# Altium PCB relaytimer.PcbDoc
Units mm, origin at the board's own origin, x right, y up, seen from the top; angles counter-clockwise.
Board outline 82.04 x 56.9 mm, 2 copper layers (Top Layer, Bottom Layer); 23 components, 15 nets, 78 pads, 0 vias.
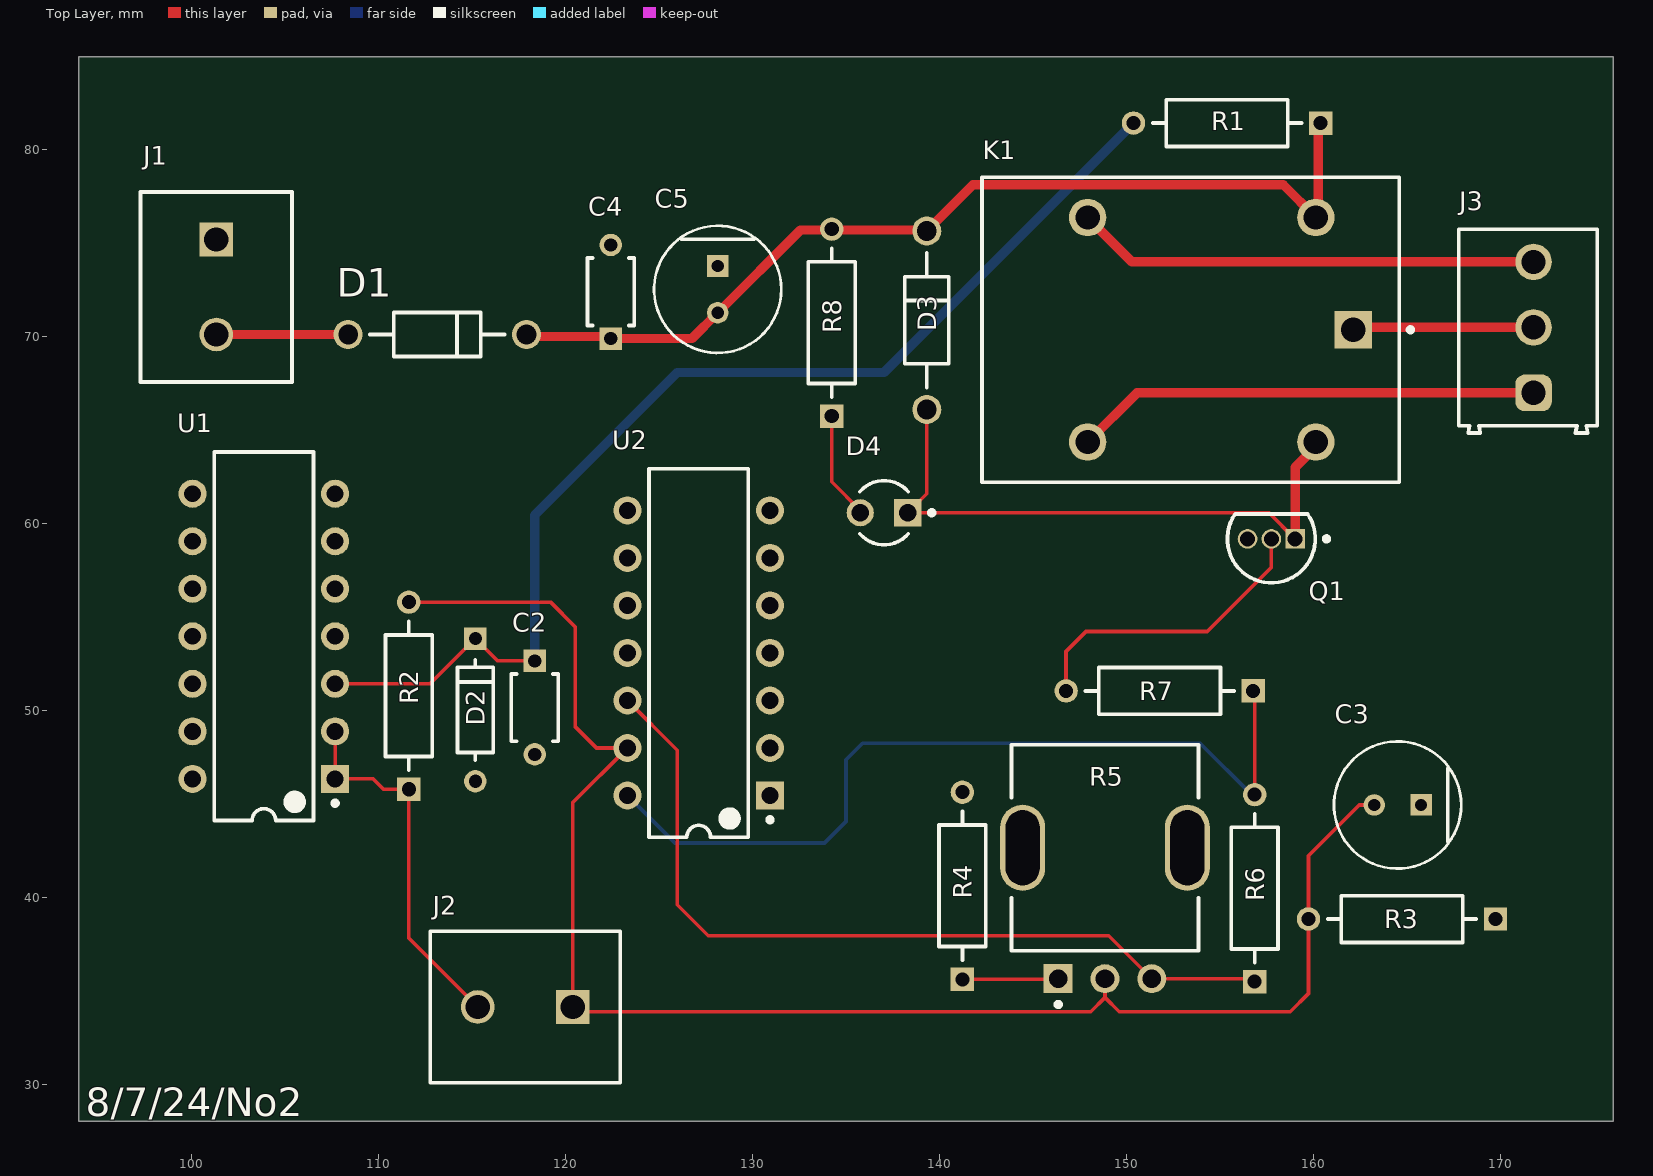
[diagram p0: Top Layer view]
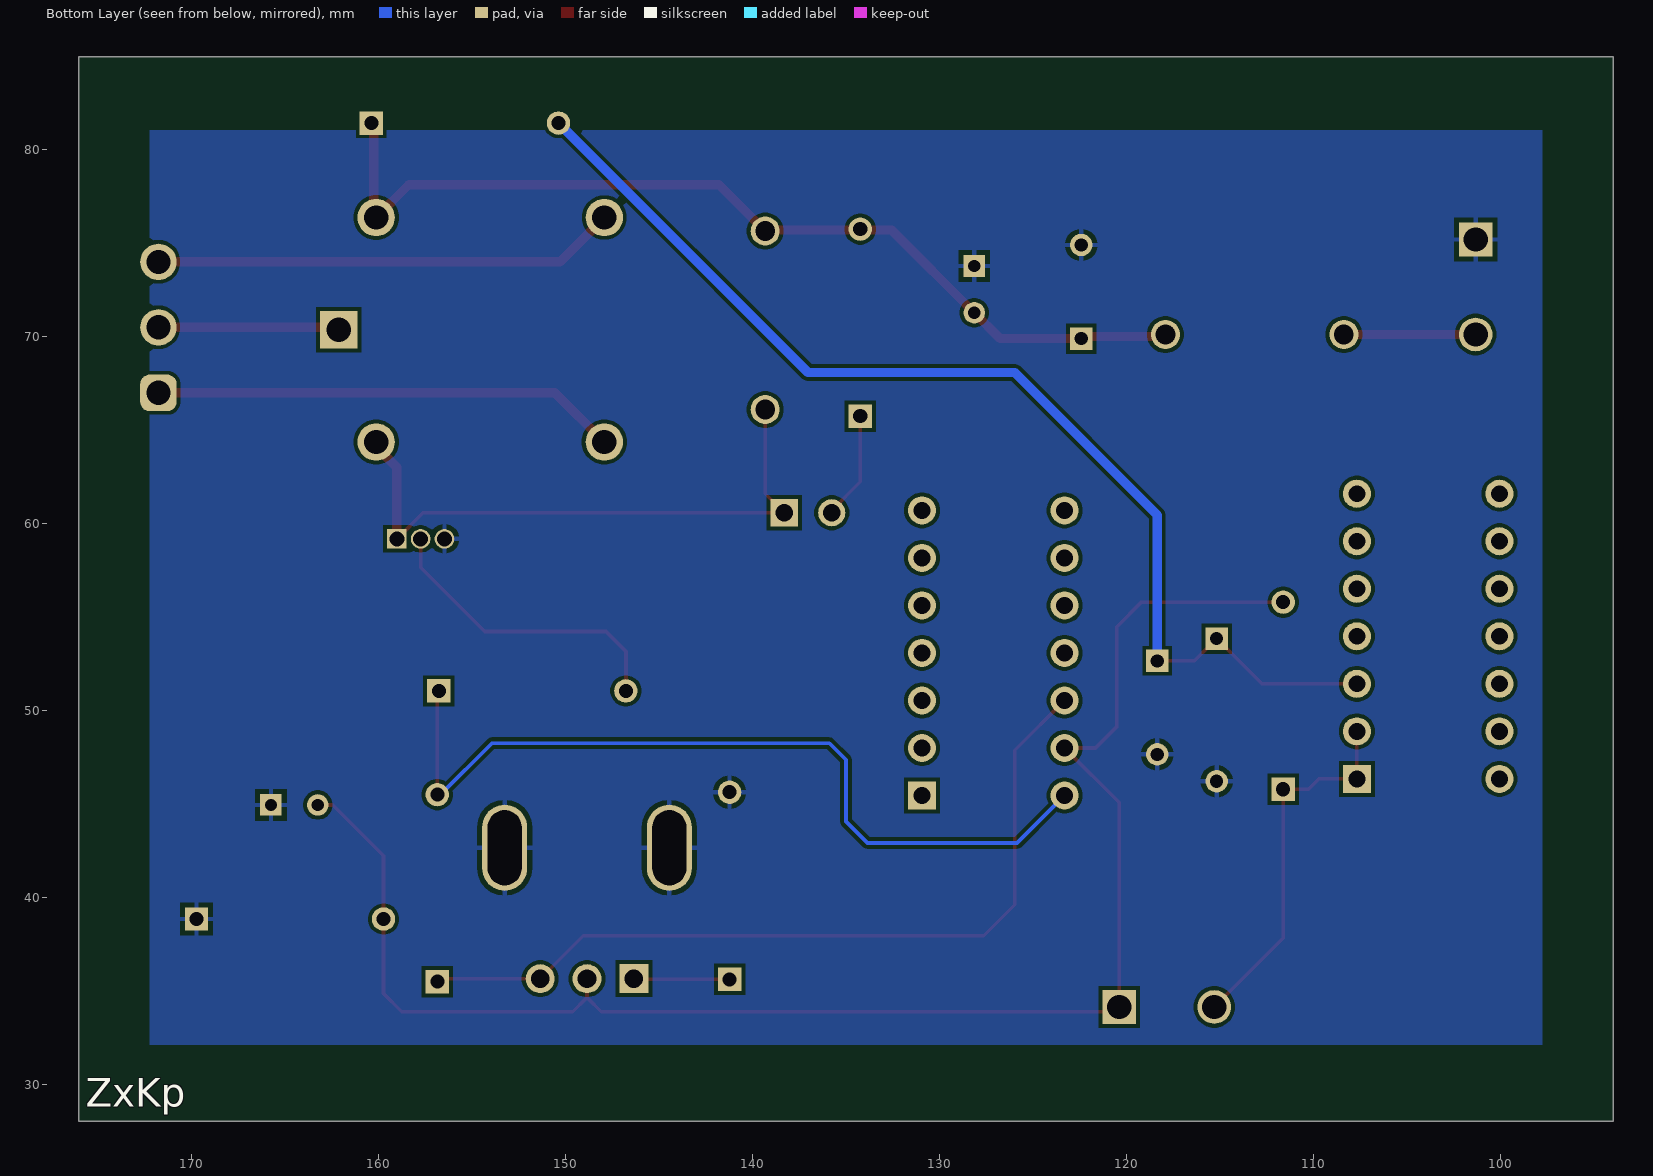
[diagram p1: Bottom Layer view, seen from below]
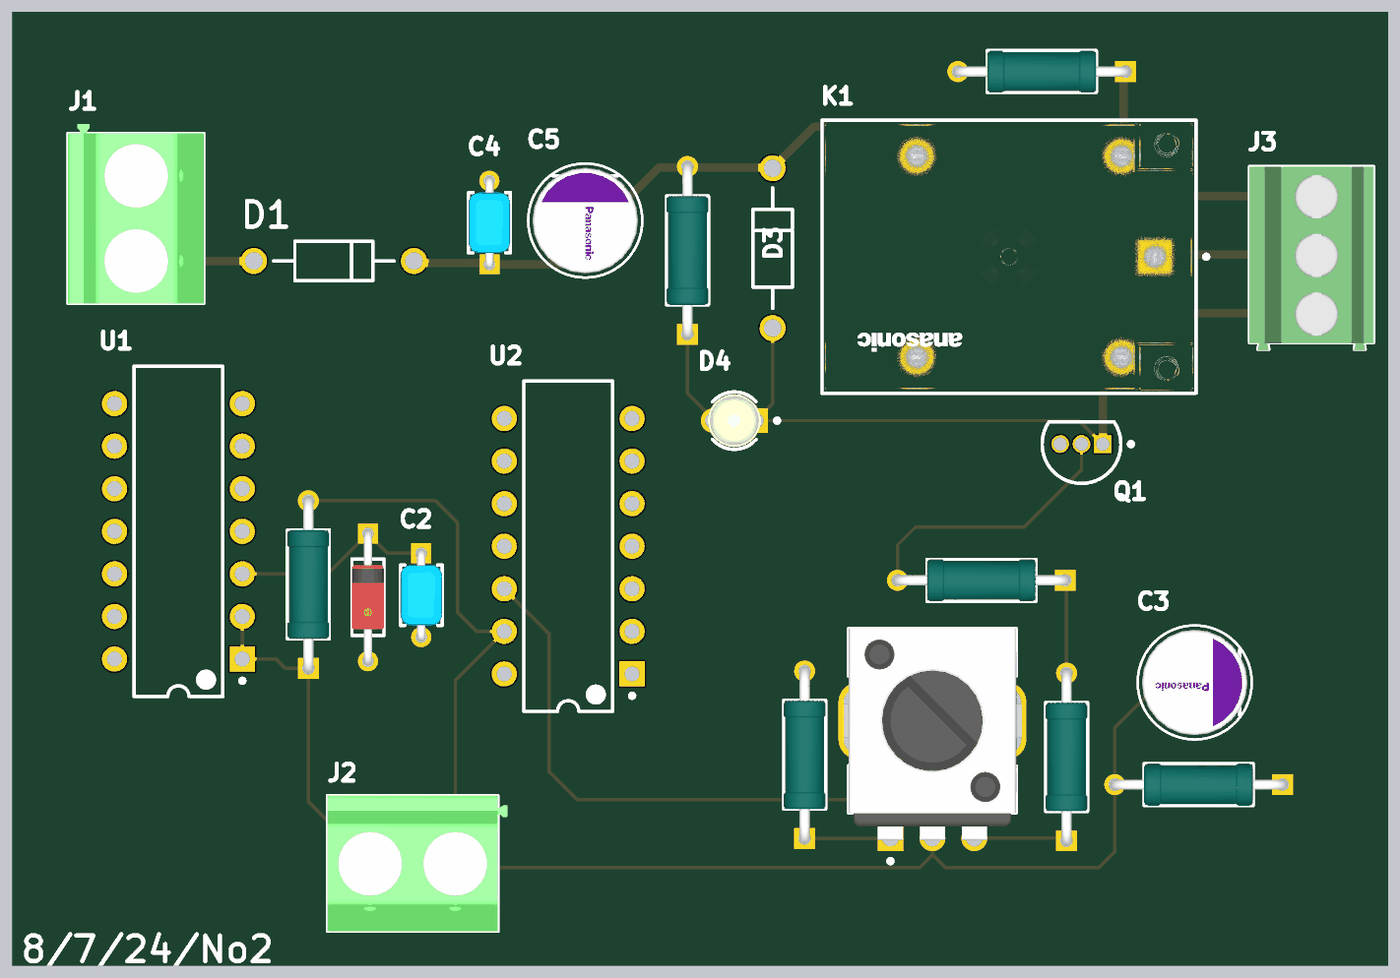
[diagram p2: 3D render of the assembled board from above, using the file's embedded part models]

## Layer stack, top to bottom
Top Solder: solder mask 0.0102, Solder Resist, Dk 3.5
Top Layer: signal copper 0.0356
Dielectric 1: dielectric 0.32, FR-4, Dk 4.8
Bottom Layer: signal copper 0.0356
Bottom Solder: solder mask 0.0102, Solder Resist, Dk 3.5

## Board outline
93.98,28.067 176.022,28.067 176.022,84.963 93.98,84.963

## Design rules (kind name [scope] priority, off if disabled: settings)
Clearance [All] p1: gap=0.2 ignorepadtopadclearanceinfootprint=FALSE
PolygonConnect [All] p1: connectstyle=Relief reliefconductorwidth=0.254 reliefentries=4 polygonreliefangle="90 Angle" airgapwidth=0.254
RoutingVias [All] p1: holewidth=0.3 width=0.7 viastyle="Through Hole" minholewidth=0.3 minwidth=0.7 maxholewidth=0.3 maxwidth=0.7
SolderMaskExpansion [All] p1: expansion=0.102 istentingtop=FALSE
SupplyNets "Schematic Supply Nets_1" [InNet('5V')] p1: voltage=0.000
SupplyNets "Schematic Supply Nets" [InNet('GND')] p2: voltage=0.000
Width [All] p1: maxlimit=1 minlimit=0.2 preferedwidth=0.2
30 further rules are at their usual default settings.

## Components (designator, comment, footprint, x,y, rotation, side; value= is the part's Value field where it differs from the comment)
C2 "100nF" FP-RCE0K1-MFG 118.364,50.165 r270 top
C3 "100uF" FP-OS-CON-TH-C6-d_0_45-MFG 164.485,44.958 r180 top
C4 "100nF" FP-RCE0K1-MFG 122.428,72.39 r90 top
C5 "470uF" FP-OS-CON-TH-C6-d_0_45-MFG 128.143,72.517 r270 top
D1 "1N4007" ONSC-AXIAL_LEAD-2-59-10_P 113.157,70.104 r180 top
D2 "5.1V" FP-017AG-MFG 115.189,50.038 r270 top
D3 "1N4007" ONSC-AXIAL_LEAD-2-59-10_P 139.319,70.866 r270 top
D4 "red" FP-HLMP-1719-MFG 137.033,60.579 r180 top
J1 "1729128" PHOE-1729128-2_V 101.346,72.644 r270 top
J2 "1729128" PHOE-1729128-2_V 117.856,34.163 r180 top
J3 "691214110003" 691214110003 171.45,70.485 r90 top
K1 "JS1-5V-F" FP-JS1-5V-F-MFG 153.416,70.358 r180 top (schematic designator K`)
Q1 "BC550CG" ONSC-TO-92-3-29-11 157.734,59.182 r180 top
R1 "1k" FP-MRS25-MFG 155.368,81.407 r180 top
R2 "1k" FP-MRS25-MFG 111.633,50.8 r90 top
R3 "10k" FP-MRS25-MFG 164.719,38.862 r180 top
R4 "120k" FP-MRS25-MFG 141.224,40.64 r90 top
R5 "PTV09A-4020F-A203" FP-PTV09A-4020-MFG 148.844,42.672 r0 top value=20kΩ
R6 "6.8M" FP-MRS25-MFG 156.845,40.513 r90 top
R7 "10k" FP-MRS25-MFG 151.765,51.054 r180 top
R8 "1k" FP-MRS25-MFG 134.239,70.739 r90 top
U1 "LM324N" N0014A 103.886,53.975 r180 top
U2 "LM324N" N0014A 127.127,53.086 r180 top

## Footprints (in the part's own frame and the unit in brackets; to place one, negate y for a bottom-side part, rotate by r counter-clockwise, add the part's x,y. Pads: shape width x height; smd on the part's side, far side on the other; paste and mask are expansions set on the pad)
691214110003 [mm] "3.50 mm Horizontal Entry Modular, 3p"
  rrect50% 1.95x1.95 hole 1.3: 1(-3.5,-0.3)
  round 1.95 hole 1.3: 2(0,-0.3) 3(3.5,-0.3)
  silkscreen extent -5.65,-3.7 5.25,3.7, body extent -5.7,-3.7 5.25,3.7, height 8.55
FP-017AG-MFG [mm]
  rect 1.2x1.2 hole 0.7 paste-2539.97 mask+0: 1(-3.813,0)
  round 1.2 hole 0.7 paste-2539.97 mask+0: 2(3.813,0)
  silkscreen extent -2.68,-0.95 2.68,0.95, body extent -4.51,-1.05 4.51,1.05, height 0.25
FP-HLMP-1719-MFG [mm]
  rect 1.45x1.45 hole 0.95 paste-2539.97 mask+0: 1(-1.27,0)
  round 1.45 hole 0.95 paste-2539.97 mask+0: 2(1.27,0)
  silkscreen extent -2.68,-1.71 1.3,1.71, body extent -2.22,-2.22 2.22,2.22, height 0.25
FP-JS1-5V-F-MFG [mm]
  rect 2x2 hole 1.3 paste-2539.97 mask+0: 1(-8.7,0)
  round 2 hole 1.3 paste-2539.97 mask+0: 2(-6.7,-6) 3(5.5,-6) 4(5.5,6) 5(-6.7,6)
  silkscreen extent -11.88,-8.15 11.15,8.15, body extent -11.25,-8.25 11.25,8.25, height 0.25
FP-MRS25-MFG [mm]
  rect 1.25x1.25 hole 0.75 paste-2539.97 mask+0: 1(-5,0)
  round 1.25 hole 0.75 paste-2539.97 mask+0: 2(5,0)
  silkscreen extent -3.98,-1.25 3.98,1.25, body extent -5.72,-1.35 5.72,1.35, height 0.25
FP-OS-CON-TH-C6-d_0_45-MFG [mm]
  rect 1.15x1.15 hole 0.65 paste-2539.97 mask+0: 1(-1.25,0)
  round 1.15 hole 0.65 paste-2539.97 mask+0: 2(1.25,0)
  silkscreen extent -3.4,-3.4 3.4,3.4, body extent -3.5,-3.5 3.5,3.5, height 0.25
FP-PTV09A-4020-MFG [mm]
  rect 1.55x1.55 hole 1 paste-2539.97 mask+0: 1(-2.5,-7)
  round 1.55 hole 1 paste-2539.97 mask+0: 2(0,-7) 3(2.5,-7)
  rrect100% 2.4x4.6 hole 4 slot 1.8 at 0 deg paste-2539.97 mask+0: 4(-4.4,0) 5(4.4,0)
  silkscreen extent -5,-8.5 5,5.5, body extent -5.8,-7.88 5.8,5.6, height 0.25
FP-RCE0K1-MFG [mm]
  rect 1.2x1.2 hole 0.7 paste-2539.97 mask+0: 1(-2.5,0)
  round 1.2 hole 0.7 paste-2539.97 mask+0: 2(2.5,0)
  silkscreen extent -1.8,-1.25 1.8,1.25, body extent -3.2,-1.35 3.2,1.35, height 0.25
N0014A [mm] "DIP, 14-Leads, Body 19.7x6.6mm, Pitch 2.54mm"
  rect 1.5x1.5 hole 0.9: 1(-3.81,7.62)
  round 1.5 hole 0.9: 2(-3.81,5.08) 3(-3.81,2.54) 4(-3.81,0) 5(-3.81,-2.54) 6(-3.81,-5.08) 7(-3.81,-7.62) 8(3.81,-7.62) 9(3.81,-5.08) 10(3.81,-2.54) 11(3.81,0) 12(3.81,2.54) 13(3.81,5.08) 14(3.81,7.62)
  silkscreen extent -3.94,-9.85 2.65,9.85, body extent -3.95,-9.85 3.95,9.85, height 5.08
ONSC-AXIAL_LEAD-2-59-10_P [mm] "AXIAL, 2-Leads, Diameter 2.35mm"
  round 1.55 hole 1.05: 1(-4.77,0) 2(4.77,0)
  silkscreen extent -3.59,-1.17 3.59,1.17
ONSC-TO-92-3-29-11 [mm] "TO, 3-Leads, Body Dia 4.7mm, Pitch 1.27mm"
  rect 1.05x1.05 hole 0.8: 1(-1.27,0)
  round 1.05 hole 0.8: 2(0,0) 3(1.27,0)
  silkscreen extent -3.08,-1.34 2.35,2.35, body extent -2.35,-1.33 2.36,2.36, height 7.87
PHOE-1729128-2_V [mm] "Receptacle, 2-Leads, Body 8.1x10.16mm, Pitch 5.08mm"
  rect 1.8x1.8 hole 1.3: 1(-2.54,0)
  round 1.8 hole 1.3: 2(2.54,0)
  silkscreen extent -5.08,-4.05 5.08,4.05, body extent -5.65,-4.05 5.08,4.05, height 10.01

## Part data
C2 C4: library part CMP-06035-058483-1, "Cap Ceramic 100nF 50V X7R ±10% Radial 5mm +125°C Automotive Bulk", Case/Package=Radial, Dielectric=X7R, Max Operating Temperature=125°C, Min Operating Temperature=-55°C, Package Quantity=500, Ratings=AEC-Q200, Resistor Type=Ceramic, Tolerance=10%, Voltage=50V, Capacitance=100nF, Depth=2.5mm, Height=3.5mm, Height - Seated (Max)=0.138inch, Lead Diameter=0.5mm, Lead Free="Lead Free", Lead Pitch=0.197inch, Lead/Base Style="Formed Leads", Length=3.6mm, Mount="Through Hole", Packaging=Bulk, Termination=Radial, Voltage Rating=50V, Voltage Rating (DC)=50V, Width=0.098inch
C3: library part CMP-05428-000575-1, "Conductive Polymer Aluminum Solid Capacitors (OS-CON) 100uF ±20% 16V RADIAL TH 6.3x6mm", Case/Package=Radial, ESR (Equivalent Series Resistance)=24mR, Leakage Current=280uA, Max Operating Temperature=105°C, Min Operating Temperature=-55°C, Package Quantity=500, Ripple Current=2.49A, Tolerance=20%, Voltage=16V, Capacitance=100uF, Construction=RADIAL, Diameter=6.3mm, Dissipation Factor=12%, Height=6mm, Height - Seated (Max)=0.236inch, Lead Diameter=0.45mm, Lead Free="Lead Free", Lead Pitch=2.5mm, Length=6mm, Life (Hours)=5000Hour, Mount="Through Hole", Number of Pins=6, Packaging=Bulk, Polarity=Polar, Radiation Hardening=No, REACH SVHC="No SVHC", RoHS Compliant=Yes, Series="OS-CON™, SEPC", Termination=Radial, Voltage Rating=16V, Voltage Rating (DC)=16V
C5: library part CMP-05428-000575-1, "Conductive Polymer Aluminum Solid Capacitors (OS-CON) 470uF ±20% 16V RADIAL TH 6.3x6mm", Case/Package=Radial, ESR (Equivalent Series Resistance)=24mR, Leakage Current=280uA, Max Operating Temperature=105°C, Min Operating Temperature=-55°C, Package Quantity=500, Ripple Current=2.49A, Tolerance=20%, Voltage=16V, Capacitance=470uF, Construction=RADIAL, Diameter=6.3mm, Dissipation Factor=12%, Height=6mm, Height - Seated (Max)=0.236inch, Lead Diameter=0.45mm, Lead Free="Lead Free", Lead Pitch=2.5mm, Length=6mm, Life (Hours)=5000Hour, Mount="Through Hole", Number of Pins=6, Packaging=Bulk, Polarity=Polar, Radiation Hardening=No, REACH SVHC="No SVHC", RoHS Compliant=Yes, Series="OS-CON™, SEPC", Termination=Radial, Voltage Rating=16V, Voltage Rating (DC)=16V
D1 D3: library part CMP-0902-00142-1, "Standard Recovery Rectifier, 2-Pin Axial_Lead, Pb-Free, Bulk Bag", Manufacturer="On Semiconductor", ComponentLink1Description="Manufacturer URL", ComponentLink1URL=http://www.onsemi.com/, ComponentLink2Description=Datasheet, ComponentLink2URL=http://www.onsemi.com/pub_link/Collateral/1N4001-D.PDF, ComponentLink3Description="Package Specification", ComponentLink3URL=http://www.onsemi.cn/pub_link/Collateral/59-10.PDF, DatasheetVersion="Rev. 13", IFSM Max (A)=30, IO(rec) Max (A)=1, Mounting Technology="Through Hole", PackageDescription="2-Pin, Axial Lead, Diameter 2.35 mm", PackageReference=AXIAL_LEAD-2-59-10, PackageVersion="Rev. U, 02/2005", Packing="Bulk Bag", PartNumber=1N4007, RoHS=TRUE, Type="Standard Recovery", VRRM Max (V)=1000
D2: library part CMP-00278-84409037-1, "BZX79C3V3 BZX79C Series 500 mW 5.1 V 100 mA Through Hole Zener Diode - DO-35", Breakdown Voltage=3.3V, Capacitance=200pF, Forward Voltage=1.5V, Manufacturer Lifecycle Status=ACTIVE, Max Junction Temperature (Tj)=200°C, Max Power Dissipation=500mW, Max Reverse Leakage Current=25µA, Min Operating Temperature=-65°C, Reverse Voltage=1V, Test Current=5mA, Tolerance=6%, Voltage Tolerance=5%, Contact Plating=Tin, Diameter=1.91mm, Element Configuration=Single, ESD Protection=No, Height=1.91mm, Impedance=95Ω, Lead Free="Lead Free", Length=4.56mm, Lifecycle Status=Production, Max Operating Temperature=200°C, Mount="Through Hole", NexarPartId=84409037, Number of Pins=2, Packaging=Bulk, Peak Reverse Current=25µA, Power Dissipation=500mW, Power Rating=500mW, REACH SVHC="No SVHC", RoHS=Compliant, Schedule B="8541100050, 8541100050", Voltage Rating (DC)=3.3V, Weight=80g, Width=6.35mm, Working Voltage=3.3V, Zener Current=5mA, Zener Voltage=3.3V
D4: library part CMP-2000-06410-2, "LED RED  / DIFFUSED T-1 T/H", Colour=Yellow, Forward Current=2mA, Forward Voltage=1.8V, Manufacturer=Broadcom, Manufacturer Part Number=HLMP-1719, Package=0, Power Dissipation=17.5mW, Reverse Voltage=5V, Temperature="-40°C to +100°C", Temperature Range High=+100°C, Temperature Range Low=-40°C, Automotive=No, Category=Diode, ComponentLink2Description=Datasheet, ComponentLink2URL=https://docs.broadcom.com/docs/AV02-1557EN, Device Class L1=Optoelectronics, Device Class L2=LEDs, Device Class L3=unset, Digikey Description="LED YELLOW DIFFUSED T-1 T/H", Lead Free=Yes, Led Orientation=Straight, Luminous Intensity=2.1mcd, Mouser Description="Standard LEDs - Through Hole Yellow Diffused 585nm 2.1mcd", Octopart=https://octopart.com/hlmp-1719-broadcom-71130405, RoHS=TRUE, Viewing Angle=50°, Wavelength=585nm
J1 J2: library part CMP-2000-05815-1, "PCB Terminal Block, 13.5 A, 400 V, 2-Pin THD, RoHS, Bulk", Current Rating=13500mA, Manufacturer="Phoenix Contact", Package Description="2-Pin Through Hole Device, Body 8.1 x 10.16 mm, Pitch 5.08 mm", Package Reference=1729128-2, Package Version=03/2015, Voltage Rating=400V, Datasheet URL=https://datasheet.ciiva.com/16046/1729128-16046181.pdf, Datasheet Version=12/2013, Manufacturer URL=http://www.phoenixcontact.com/, Mounting Technology=ThroughHole, No. of Positions=2, No. of Rows=1, Orientation=Horizontal, Package URL=https://www.phoenixcontact.com/online/portal/pi/pxc/product_detail_page/!ut/p/b1/3VdJjqNKFDxLH8AFycySyWY2ozFsEPOMMQaDOX1XedGL_1Vdm5YXJleknhSKeBkvI6EA8ncAo3AYoDhBQGco6KN7VURTdemj9us_IEKEZo_YHiPAEWEFmDGOHMORkqKYCORBZxgL7ZoaZYcbFFUZ3fqxSY6GOuxydWUuHqz1ynmMFygu583Bob0Ewr6Sd_l-5m-kAueHiB0jpRwZwe58wwtkpxtMYd_LmGcDRU02dRNEyWt6Y2ti5pSyJ_reIkzIulrqApdnbT11V5jnCKbYNCvhEM1MCpPByat_X379-iThf08CI5GfOPqfBeS3BRoBOdD55AKVv0iLwCMq-2BrzXWSGRH7pUGD9uwXQjiph3xL0DKQwdGa0JImiIOmBNOestqgwTHSSs2oOep-78apyXQBvNi8ZLaFjvjWvcaUEBu0MC6Wbe-d6mB0FAebo2lUWinqYaZs5DAYzV0RP9yitUjnGJ0iI9xhZkT42OCQNUJJhkgWINNQLP2JFP6OpMg3JCVg70jqHT0lvKOnhHf0lPuOnnLf0VPuWx6_dxwUIvwk5WMkT0kLL1mh61l2yZVSzG3pYV_bqo-mj6uMKwKwdnnW8Jh5RTOJzMOA5c-eJDaZQw4mTMPH02PvS_ZAqNVjVTo2WyYLkwH_KU1mmmG5kjRhDqPXLwwVHvVOjCM60-fpXvTDfMGW1PVFVS1r4e4yVDk4ZdNbkUHvqPqQSeian4UD39fNKmachqdJ1NJbyk8rXT9mXTvPk3oE5meulKGgiruPJek-4I9hTT6G8ZLOyRSm2RRVbThERQad5OS28hdt4YW4vG0stgYYzsWsK4_7y6DZMjJSCqri1kyiZR5vD7pwIrNR7QwPHTcLTI5qT7eRlpHrdGiupYlqQDJ7zy_CND8fWWBoLRXxk1RVcXiBQwbTD4Xi7KL-FuO94t9xaqweXzH, Packing=Bulk, PartNumber=1729128, Pitch=5.08mm, RoHS=TRUE
J3: library part CMP-1502-02466-2, Color="Blue, Green", Current=10A, Max Operating Temperature=105°C, Min Operating Temperature=-40°C, Voltage=300V, Contact Material=Brass, Contact Plating="Brass, Tin", Current Rating=10A, Height=12.2mm, Housing Material=Nylon, Lead Pitch=3.5mm, Length=7.4mm, Mount="Through Hole", NexarPartId=18818289, Number of Contacts=3, Number of Levels=1, Number of Pins=3, Number of Positions Per Level=3, Packaging=Box, Pitch=3.5052mm, Plating="Brass, Steel", REACH SVHC=Unknown, RoHS=Compliant, Stripping Length=-6mm, Termination=Screw, Voltage Rating=300V, Width=10.9mm, Wire Gauge (Max)=24AWG, Wire Gauge (Min)=16AWG, Wire/Cable Gauge=24AWG
K1: library part CMP-05606-000016-1, "RELAY GEN PURPOSE SPDT 10A 5V", Ambient Temperature Range High=+70°C, Ambient Temperature Range Low=-40°C, Coil Current=72mA, Coil Power=360mW, Coil Resistance=69.4Ω, Coil Voltage=5V, Manufacturer=Panasonic, Switching Current=10A, Switching Power=150W, Temperature="-40°C to +70°C", Automotive=No, Category=Relay, Coil Type=Non-Latching, ComponentLink2Description=Datasheet, ComponentLink2URL=https://www3.panasonic.biz/ac/e_download/control/relay/power/catalog/mech_eng_js.pdf?via=ok, Device Class L1=Electromechanical, Device Class L2=Relays, Device Class L3="Power Relays", Digikey Description="RELAY GEN PURPOSE SPDT 10A 5V", Height=16.8mm, Lead Free=Yes, Manufacturer Part Number=JS1-5V-F, Mouser Description="JS Series 10 A SPDT 5 V Through Hole Sealed Miniature Non-Polarized Power Relay", Number of Contacts=1, Octopart=https://octopart.com/js1-5v-f-panasonic-39428621, Package=JS1-5V-F, RoHS=TRUE, Standoff Height=0.3mm, Temperature Range High=+70°C, Temperature Range Low=-40°C, Throw Configuration=SPDT
Q1: library part CMP-1048-01461-1, "Low Noise Transistor, NPN Silicon, 3-Pin TO-92, Pb-Free, Bulk Box", Manufacturer="On Semiconductor", ComponentLink1Description="Manufacturer URL", ComponentLink1URL=http://www.onsemi.com/, ComponentLink2Description=Datasheet, ComponentLink2URL=http://www.onsemi.com/pub_link/Collateral/BC550C-D.PDF, ComponentLink3Description="Package Specification", ComponentLink3URL=http://www.onsemi.cn/pub_link/Collateral/2N6426-D.PDF, DatasheetVersion="Rev. 2", IC Continuous (A)=0.1, Mounting Technology="Through Hole", PackageDescription="3-Pin Transistor Outline, Body 4.825 x 3.685 mm, Pitch 1.27 mm", PackageReference=TO-92-3-29-11_AM_SL, PackageVersion="Rev. AM", Packing="Bulk Box", PartNumber=BC550CG, Polarity=NPN, RoHS=TRUE
R1 R2 R3 R4 R6 R7 R8: library part CMP-00030-42757237-1, "MRS25000C1000FRP00 Resistor, 1000 Ohm, ± 1%, 600 mW, Axial Leaded, Metal Film (Thin Film), Professional", Case/Package=Axial, Max Operating Temperature=155°C, Max Power Dissipation=600mW, Min Operating Temperature=-55°C, Resistance=1kΩ, Temperature Coefficient=50ppm/°C, Tolerance=1%, Voltage Rating=350V, Composition="Metal Film, Thin Film", Contact Plating=Tin, Diameter=2.5mm, Lead Diameter=600µm, Lead Free="Lead Free", Length=6.5mm, Military Standard=Not, Mount="Through Hole", NexarPartId=42757237, Number of Pins=2, Number of Terminations=2, Packaging="Tape & Reel (TR)", Power Rating=600mW, Radiation Hardening=No, REACH SVHC=Unknown, RoHS=Compliant, Schedule B="8533210090, 8533210090", Termination=Axial, Voltage Rating (DC)=350V, Width=2.5mm
R5: library part CMP-07234-000017-1, "POT 20K OHM 1/20W CARBON LOG", Manufacturer="Bourns Inc.", Package=PTV09A-4020, Power Rating=0.05W, Resistance=20kΩ, Temperature="-10°C to +50°C", Temperature Range High=+50°C, Temperature Range Low=-10°C, Tolerance=20%, Voltage Rating=50V, Automotive=No, Category=Res, ComponentLink2Description=Datasheet, ComponentLink2URL=https://www.bourns.com/docs/product-datasheets/ptv09.pdf?sfvrsn=5e1089f1_12, Composition=Carbon, Device Class L1="Passive Components", Device Class L2=Resistors, Device Class L3="Variable Resistors and Potentiometers", Digikey Description="POT 20K OHM 1/20W CARBON LOG", Height=20.5mm, Lead Free=Yes, Manufacturer Part Number=PTV09A-4020F-A203, Mouser Description="Potentiometers 20K AUDIO 20%", Octopart=https://octopart.com/ptv09a-4020f-a203-bourns-1637636, RoHS=TRUE, Series=PTV09
U1 U2: library part CMP-0055-00082-3, "Low Power Quad Operational Amplifier, 14-pin MDIP", Manufacturer="Texas Instruments", Package Reference=N0014A, PackageTopMarking=NSUZXYYTTE#*LM324N, PowerWise=N, Code_JEDEC=MS-001-AA, ComponentLink1Description="Datasheet URL", ComponentLink1URL=http://www.ti.com/general/docs/lit/getliterature.tsp?genericPartNumber=LM324&fileType=pdf, CompType=Amplifiers, PackageDescription="MDIP, .750 x .250 x.130in, 14 Lead, .100in Pitch", PinCount=14, RoHS=N

## Nets (pads, with @x,y where several pads share a name; then routed paths per layer and width w, separated by ;. In a path a pad name is that pad's centre, name@x,y a point inside that pad or via, vN(x,y) a via of type N, cw(c..) or ccw(c..) an arc to the next point about the centre after c; other vN are vias at no path point)
5V: D1.2 J1.2 | length 7
  Top Layer w0.5: J1.2 D1.2
GND: C2.2 C3.1 C4.2 C5.1 D2.2 J1.1 Q1.3 R3.1 R4.2 R5.4 R5.5
NetC2_1: C2.1 D2.1 R1.2 U1.3 | length 60.6
  Top Layer w0.2: U1.3 112.773,51.435 D2.1 116.375,52.665 C2.1
  Bottom Layer w0.5: C2.1 118.364,60.452 125.984,68.072 137.033,68.072 R1.2
NetC3_2: C3.2 J2.1 R2.2 R3.2 R5.2 U2.13 | length 86.6
  Top Layer w0.2: R2.2 119.206,55.8 120.523,54.483 120.523,49.149 121.666,48.006 U2.13 120.396,45.085 J2.1 120.65,33.909 148.082,33.909 148.844,34.671 ; R5.2 148.844,34.671 ; C3.2 162.433,44.958 159.719,42.244 R3.2 159.719,34.878 158.75,33.909 149.606,33.909 148.844,34.671
NetC4_1: C4.1 C5.2 D1.1 D3.1 K1.2 R1.1 R8.2 | length 51.7
  Top Layer w0.5: D1.1 118.034,69.997 122.321,69.997 C4.1 126.766,69.89 C5.2 132.568,75.692 134.192,75.692 R8.2 134.29,75.688 139.267,75.688 D3.1 141.788,78.105 158.369,78.105 K1.2 160.147,76.327 160.242,76.422 160.242,81.281 R1.1
NetD3_2: D3.2 D4.1 K1.5 Q1.1 | length 32.9
  Top Layer w0.2: D3.2 139.319,61.595 D4.1 157.607,60.579 Q1.1
  Top Layer w0.5: Q1.1 159.004,62.995 160.116,64.107 K1.5
NetD4_2: D4.2 R8.1 | length 5.8
  Top Layer w0.2: R8.1 134.239,62.23 135.763,60.706 D4.2
NetJ2_2: J2.2 R2.1 U1.1 U1.2 | length 19.9
  Top Layer w0.2: U1.2 U1.1 109.728,46.355 110.283,45.8 R2.1 111.633,37.846 J2.2
NetJ3_1: J3.1 K1.4 | length 24.9
  Top Layer w0.5: K1.4 147.924,64.358 150.551,66.985 J3.1
NetJ3_2: J3.2 K1.1 | length 9.7
  Top Layer w0.5: K1.1 162.243,70.485 J3.2
NetJ3_3: J3.3 K1.3 | length 24.8
  Top Layer w0.5: K1.3 150.289,73.985 J3.3
NetQ1_2: Q1.2 R7.2 | length 16.5
  Top Layer w0.2: R7.2 146.765,53.166 147.828,54.229 154.305,54.229 157.734,57.658 Q1.2
NetR4_1: R4.1 R5.1 | length 5.4
  Top Layer w0.2: R4.1 146.312,35.64 R5.1 R5.1@146.122,35.894
NetR5_3: R5.3 R6.1 U2.12 | length 44.6
  Top Layer w0.2: U2.12 125.984,47.879 125.984,39.624 127.635,37.973 149.043,37.973 R5.3 156.686,35.672 R6.1
NetR6_2: R6.2 R7.1 U2.14 | length 45.5
  Top Layer w0.2: R7.1@156.511,51.054 R7.1@156.718,50.847 ; R6.2 R7.1@156.845,50.847
  Bottom Layer w0.2: U2.14 125.857,42.926 133.858,42.926 135.001,44.069 135.001,47.371 135.89,48.26 153.924,48.26 156.671,45.513 R6.2
pads on no net: U1.4 U1.5 U1.6 U1.7 U1.8 U1.9 U1.10 U1.11 U1.12 U1.13 U1.14 U2.1 U2.2 U2.3 U2.4 U2.5 U2.6 U2.7 U2.8 U2.9 U2.10 U2.11

## Polygon pours and split planes (outlines as drawn)
GND on Bottom Layer "GND_L02_P000" (solid, pour order 0): 97.79,32.131 97.79,81.026 172.212,81.026 172.212,32.131

## Silkscreen, mask and mechanical layers (free items; w line width, h text height)
Top Overlay:
  text "8/7/24/No2" at 94.361,28.321 h1.52
Bottom Overlay:
  text "ZxKp" at 175.641,28.829 h1.52
Mechanical 1:
  the board outline again, w0.254